# Allegro board demoa.brd
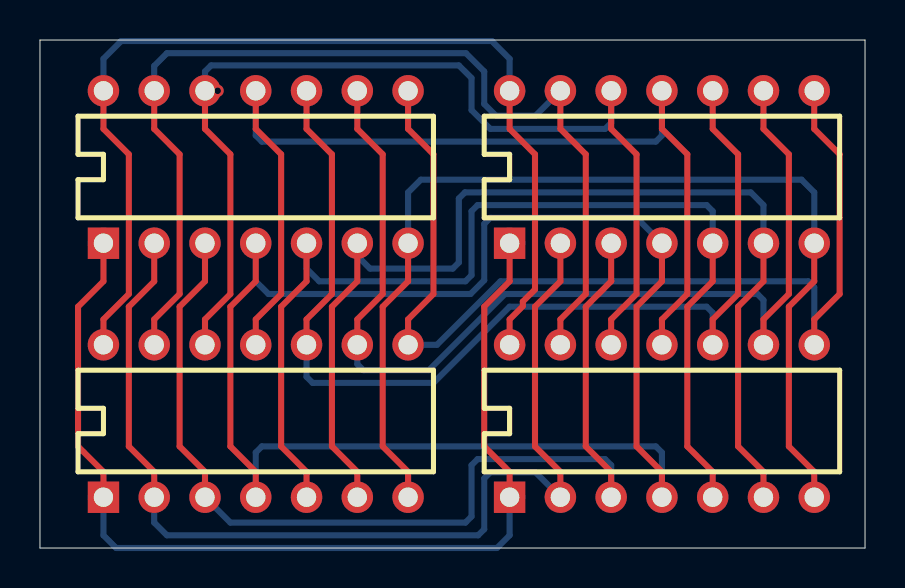
[diagram p0: board, top side]
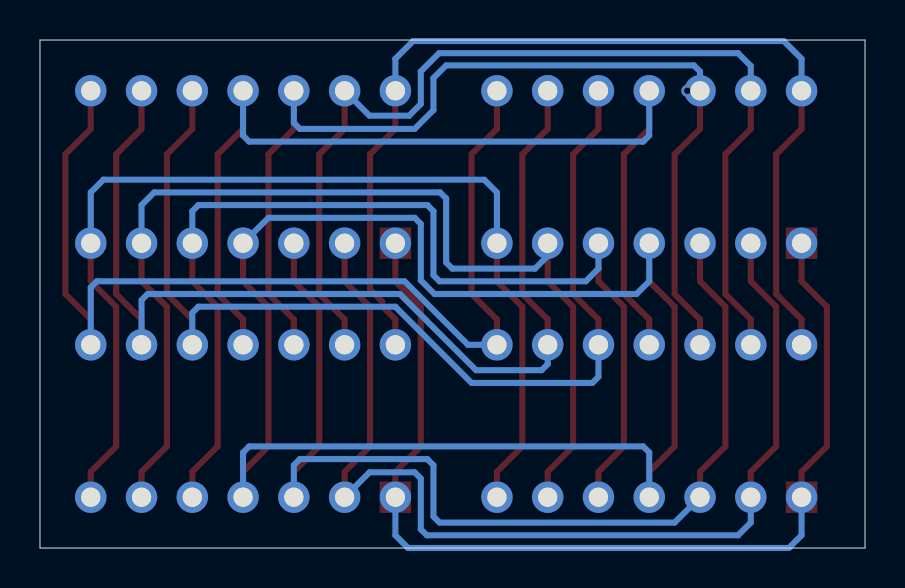
[diagram p1: board, bottom side, seen from below]

Outline 41.27 x 25.4 mm; copper layers: TOP, GND, POWER, INNER1, INNER2, BOTTOM. Coordinates in mm from the lower left corner of the outline.
Outline path: 0,25.4 0,0 41.27,0 41.27,25.4 0,25.4

## Design rules (mm)
nets with their own width: min track width 0.305; nets DAT1 DAT2 DAT3 DAT4 DAT5 DAT6 DAT7 DAT8 DAT9 DAT10 DAT11 DAT12 GND VCC

## Placement (name value [footprint] x y rotation side)
U1  7400  [DIP14]  3.17 15.24 0 top
U2  7400  [DIP14]  23.5 15.24 0 top
U3  7400  [DIP14]  3.17 2.54 0 top
U4  7400  [DIP14]  23.5 2.54 0 top

## Library data of the parts
U1-U4 = 7400

## Footprints (pads in the part's own frame, mm; a bottom-side part is the same pattern mirrored in y, then rotated)
DIP14
  rect 1.575x1.575 hole 0.965: 1(0,0)
  round 1.575 hole 0.965: 2(2.54,0) 3(5.08,0) 4(7.62,0) 5(10.16,0) 6(12.7,0) 7(15.24,0) 8(15.24,7.62) 9(12.7,7.62) 10(10.16,7.62) 11(7.62,7.62) 12(5.08,7.62) 13(2.54,7.62) 14(0,7.62)

## Nets
GND: U1.7(TP-7) U2.7(TP-7) U3.7(TP-7) U4.7(TP-7)
VCC: U1.14(TP-14) U2.14(TP-14) U3.14(TP-14) U4.14(TP-14)
DAT1: U1.2(TP-2) U2.2(TP-2) U3.2(TP-2) U4.2(TP-2)
DAT2: U1.1(TP-1) U2.1(TP-1) U3.1(TP-1) U4.1(TP-1)
DAT3: U1.3(TP-3) U2.3(TP-3) U3.3(TP-3) U4.3(TP-3)
DAT4: U1.5(TP-5) U2.5(TP-5) U3.5(TP-5) U4.5(TP-5)
DAT5: U1.4(TP-4) U2.4(TP-4) U3.4(TP-4) U4.4(TP-4)
DAT6: U1.6(TP-6) U2.6(TP-6) U3.6(TP-6) U4.6(TP-6)
DAT7: U1.10(TP-10) U2.10(TP-10) U3.10(TP-10) U4.10(TP-10)
DAT8: U1.9(TP-9) U2.9(TP-9) U3.9(TP-9) U4.9(TP-9)
DAT9: U1.8(TP-8) U2.8(TP-8) U3.8(TP-8) U4.8(TP-8)
DAT10: U1.13(TP-13) U2.13(TP-13) U3.13(TP-13) U4.13(TP-13)
DAT11: U1.12(TP-12) U2.12(TP-12) U3.12(TP-12) U4.12(TP-12)
DAT12: U1.11(TP-11) U2.11(TP-11) U3.11(TP-11) U4.11(TP-11)

## Via types
v1: diameter 0.61, hole 0.33, TOP to BOTTOM, 1 via

## Routing (per net, layer and track width the routed paths; a pad name or vN(x,y) marks a point on that pad's centre or on a via; arc(x,y) is an arc through that point)
GND: length 53.4
  TOP w0.305: U3.7 18.42,3.81 17.15,5.08 17.15,12.06 18.42,13.34 U1.7 ; U2.7 38.73,13.34 37.46,12.06 37.46,5.08 38.73,3.81 U4.7
  BOTTOM w0.305: U2.7 38.73,17.78 38.1,18.41 19.05,18.41 18.42,17.78 U1.7
VCC: length 51.8
  TOP w0.305: U3.14 3.17,11.43 4.45,12.7 4.45,19.68 3.17,20.95 U1.14 ; U4.14 23.5,11.43 24.16,12.09 24.16,12.32 24.77,12.93 24.77,19.68 23.5,20.95 U2.14
  BOTTOM w0.305: U2.14 23.5,24.46 22.61,25.35 4.06,25.35 3.17,24.46 U1.14
DAT1: length 52.7
  TOP w0.305: U3.2 5.71,3.81 4.45,5.08 4.45,12.06 5.71,13.34 U1.2 ; U2.2 26.04,13.34 24.77,12.06 24.77,5.08 26.04,3.81 U4.2
  BOTTOM w0.305: U3.2 5.71,1.27 6.35,0.64 21.92,0.64 22.23,0.94 22.23,3.48 22.53,3.78 24.79,3.78 U4.2
DAT2: length 52.2
  TOP w0.305: U1.1 3.17,13.34 1.91,12.06 1.91,5.08 3.17,3.81 U3.1 ; U4.1 23.5,3.81 22.23,5.08 22.23,12.06 23.5,13.34 U2.1
  BOTTOM w0.305: U4.1 23.5,0.64 22.86,0 3.81,0 3.17,0.64 U3.1
DAT3: length 52.9
  TOP w0.305: U1.3 8.26,13.34 6.98,12.06 6.98,5.08 8.26,3.81 U3.3 ; U4.3 28.58,3.81 27.31,5.08 27.31,12.06 28.58,13.34 U2.3
  BOTTOM w0.305: U4.3 28.58,4.14 28.27,4.45 21.89,4.45 21.59,4.14 21.59,1.57 21.29,1.27 9.53,1.27 U3.3
DAT4: length 54.5
  TOP w0.305: U3.5 13.33,3.81 12.06,5.08 12.06,12.06 13.33,13.34 U1.5 ; U4.5 33.66,3.81 32.38,5.08 32.38,12.06 33.66,13.34 U2.5
  BOTTOM w0.305: U2.5 33.66,16.84 33.35,17.14 21.89,17.14 21.59,16.84 21.59,13.64 21.29,13.34 13.97,13.34 13.33,13.97 U1.5
DAT5: length 78.8
  TOP w0.305: U4.4 31.12,3.81 29.85,5.08 29.85,12.06 31.12,13.34 U2.4 ; U1.4 10.79,13.34 9.53,12.06 9.53,5.08 10.79,3.81 U3.4
  BOTTOM w0.305: U3.4 10.79,4.78 11.1,5.08 30.81,5.08 31.12,4.78 U4.4 ; U1.4 10.79,13.34 11.43,12.7 21.54,12.7 22.23,13.39 22.23,16.21 22.53,16.51 29.85,16.51 U2.4
DAT6: length 54.3
  TOP w0.305: U3.6 15.88,3.81 14.61,5.08 14.61,12.06 15.88,13.34 U1.6 ; U4.6 36.2,3.81 34.92,5.08 34.92,12.06 36.2,13.34 U2.6
  BOTTOM w0.305: U1.6 15.88,14.61 16.51,13.97 20.65,13.97 20.96,14.27 20.96,17.48 21.26,17.78 35.56,17.78 36.2,17.14 U2.6
DAT7: length 52.9
  TOP w0.305: U3.10 13.33,11.43 14.61,12.7 14.61,19.68 13.33,20.95 U1.10 ; U2.10 33.66,20.95 34.92,19.68 34.92,12.7 33.66,11.43 U4.10
  BOTTOM w0.305: U4.10 33.66,11.76 33.35,12.06 23.5,12.06 19.69,8.26 13.64,8.26 13.33,8.56 U3.10
DAT8: length 52.9
  TOP w0.305: U1.9 15.88,20.95 17.15,19.68 17.15,12.7 15.88,11.43 U3.9 ; U2.9 36.2,20.95 37.46,19.68 37.46,12.7 36.2,11.43 U4.9
  BOTTOM w0.305: U4.9 36.2,12.4 35.89,12.7 23.27,12.7 19.46,8.89 16.18,8.89 15.88,9.19 U3.9
DAT9: length 52.1
  TOP w0.305: U1.8 18.42,20.95 19.69,19.68 19.69,12.7 18.42,11.43 U3.8 ; U2.8 38.73,20.95 40,19.68 40,12.7 38.73,11.43 U4.8
  BOTTOM w0.305: U4.8 38.73,13.03 38.43,13.34 23.04,13.34 19.86,10.16 U3.8
DAT10: length 52.1
  TOP w0.305: U2.13 26.04,20.95 27.31,19.68 27.31,12.7 26.04,11.43 U4.13 ; U3.13 5.71,11.43 6.98,12.7 6.98,19.68 5.71,20.95 U1.13
  BOTTOM w0.305: U2.13 24.79,21.62 22.81,21.62 22.23,22.2 22.23,23.83 21.31,24.74 6.35,24.74 5.71,24.1 U1.13
DAT11: length 54.2
  TOP w0.305: v1(8.89,22.86) U1.12 8.26,20.95 9.53,19.68 9.53,12.7 8.26,11.43 U3.12 ; U2.12 28.58,20.95 29.85,19.68 29.85,12.7 28.58,11.43 U4.12
  BOTTOM w0.305: v1(8.89,22.86) U1.12 8.26,23.83 8.56,24.13 20.96,24.13 21.59,23.5 21.59,21.89 22.53,20.95 28.27,20.95 28.58,21.26 U2.12
DAT12: length 52.5
  TOP w0.305: U1.11 10.79,20.95 12.06,19.68 12.06,12.7 10.79,11.43 U3.11 ; U2.11 31.12,20.95 32.38,19.68 32.38,12.7 31.12,11.43 U4.11
  BOTTOM w0.305: U1.11 10.79,20.62 11.1,20.32 30.81,20.32 31.12,20.62 U2.11
